# Altium PCB PCB2 - Copie.PcbDoc
Units mm, origin at the board's own origin, x right, y up, seen from the top; angles counter-clockwise.
Board outline 50 x 50 mm, 2 copper layers (Top Layer, Bottom Layer); 85 components, 71 nets, 280 pads, 0 vias.
Unrouted connection lines stored in the file: 176.
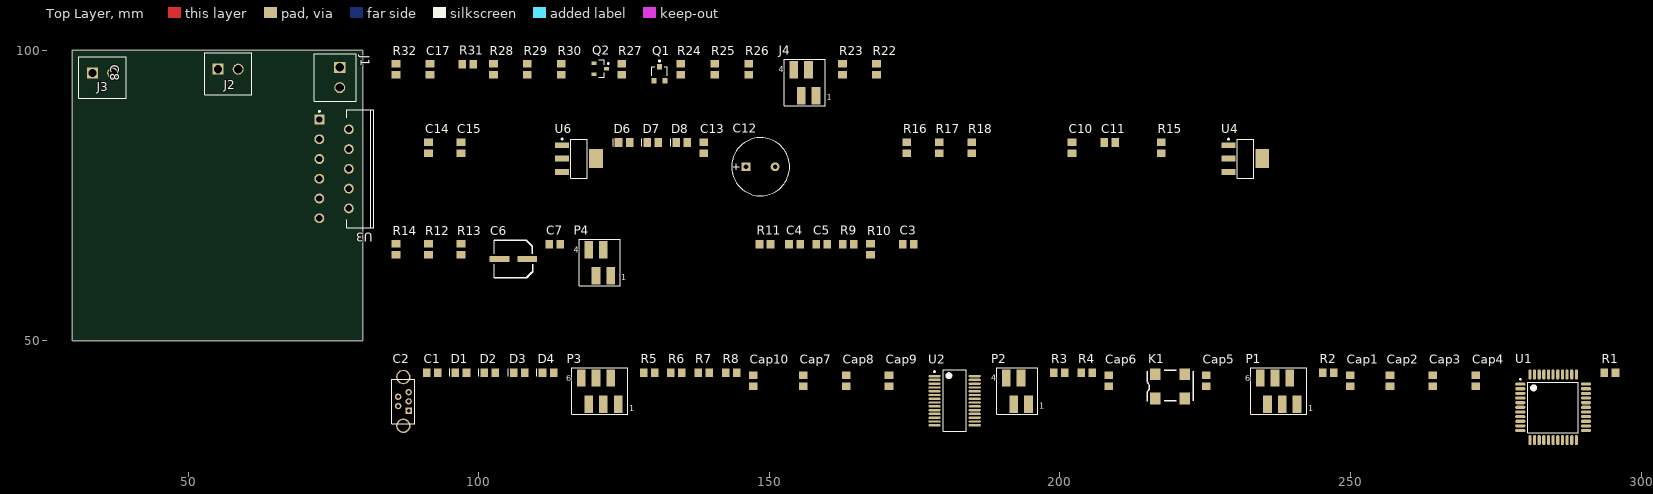
[diagram p0: Top Layer view]
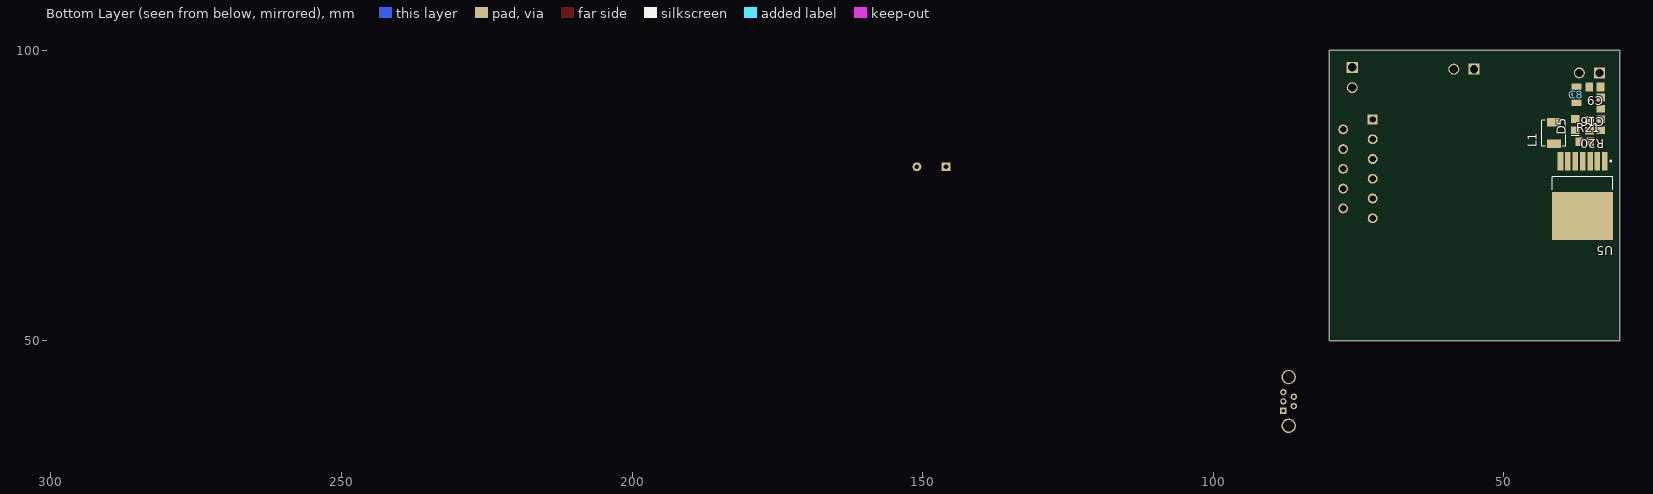
[diagram p1: Bottom Layer view, seen from below]

## Layer stack, top to bottom
Top Solder: solder mask 0.0102, Solder Resist, Dk 3.5
Top Layer: signal copper 0.0356
Dielectric 1: dielectric 0.32, FR-4, Dk 4.8
Bottom Layer: signal copper 0.0356
Bottom Solder: solder mask 0.0102, Solder Resist, Dk 3.5

## Board outline
30,100 80,100 80,50 30,50

## Design rules (kind name [scope] priority, off if disabled: settings)
Clearance [All] p1: gap=0.254
PolygonConnect [All] p1: connectstyle=Relief reliefconductorwidth=0.254 reliefentries=4 polygonreliefangle="90 Angle" airgapwidth=0.254
RoutingVias [All] p1: holewidth=0.711 width=1.27 viastyle="Through Hole" minholewidth=0.711 minwidth=1.27 maxholewidth=0.711 maxwidth=1.27
SolderMaskExpansion [All] p1: expansion=0.102
UnpouredPolygon [All] p1: allowunpoured=FALSE
Width [All] p1: maxlimit=0.254 minlimit=0.254 preferedwidth=0.254
29 further rules are at their usual default settings.

## Classes and differential pairs
component class "Sheet 1 - Micro": C1 C2 Cap1 Cap2 Cap3 Cap4 Cap5 Cap6 Cap7 Cap8 Cap9 Cap10 D1 D2 D3 D4 K1 P1 P2 P3 R1 R2 R3 R4 R5 R6 R7 R8 U1 U2
component class "Sheet 2 - Moteurs": C3 C4 C5 C6 C7 J1 P4 R9 R10 R11 R12 R13 R14 U3
component class "Sheet 3 - Alims": C8 C9 C10 C11 C12 C13 C14 C15 C16 D5 D6 D7 D8 J2 J3 L1 R15 R16 R17 R18 R20 R21 U4 U5 U6 ""
component class "Sheet 4 - Capteurs": C17 J4 Q1 Q2 R22 R23 R24 R25 R26 R27 R28 R29 R30 R31 R32

## Components (designator, comment, footprint, x,y, rotation, side; value= is the part's Value field where it differs from the comment)
C1 "100pF" C0805 91.957,44.503 r0 top
C2 "WE-Communication Connectors 651005136421" 651005136421 87.004,39.55 r90 top
C3 "0.1uF" C0805 173.872,66.601 r0 top
C4 "10nF" C0805 154.314,66.601 r0 top
C5 "10nF" C0805 159.013,66.601 r0 top
C6 "220uF" "Capa CMS D6.3_E1.8" 105.927,64.061 r0 top
C7 "1uF" C0805 113.039,66.601 r0 top
C8 "100uF" C1206 37.475,92.325 r270 bottom
C9 "0.1uF" C0805 34.275,93.675 r0 bottom
C10 "1uF" C0805 202.066,83.238 r90 top
C11 "10uF" C0805 208.543,84.127 r0 top
C12 "1200uF" CAPA_D10_E5 148.472,79.936 r0 top
C13 "0.1uF" C0805 138.693,83.238 r90 top
C14 "1UF" C0805 91.322,83.238 r90 top
C15 "10uF" C0805 96.91,83.238 r90 top
C16 "0.2uF" C0805 33.275,90.9 r270 bottom
C17 "100pF" C0805 91.576,96.7 r90 top
Cap1 "0.1uF" C0805 249.945,43.106 r90 top
Cap2 "0.1uF" C0805 256.803,43.106 r90 top
Cap3 "0.1uF" C0805 264.169,43.106 r90 top
Cap4 "0.1uF" C0805 271.535,43.106 r90 top
Cap5 "0.1uF" C0805 225.18,43.106 r90 top
Cap6 "0.1uF" C0805 208.416,43.106 r90 top
Cap7 "0.1uF" C0805 155.838,43.106 r90 top
Cap8 "0.1uF" C0805 163.204,43.106 r90 top
Cap9 "4.7uF" C0805 170.57,43.106 r90 top
Cap10 "0.1uF" C0805 147.202,43.106 r90 top
D1 "LED" "LED 0805" 96.91,44.503 r0 top
D2 "LED" "LED 0805" 101.863,44.503 r0 top
D3 "LED" "LED 0805" 106.943,44.503 r0 top
D4 "LED" "LED 0805" 111.896,44.503 r0 top
D5 "D Schottky" D0805 37.675,87.2 r90 bottom
D6 "LED" "LED 0805" 124.977,84.127 r0 top
D7 "LED" "LED 0805" 129.93,84.127 r0 top
D8 "LED" "LED 0805" 134.883,84.127 r0 top
J1 "WE Type 691321100002" 691321100002 76.05,95.3 r270 top
J2 "WE Type 691321100002" 691321100002 56.825,96.725 r0 top
J3 "WE Type 691321100002" 691321100002 35.225,96.1 r0 top
J4 "WE 4 pins" 690367280476 156.092,94.414 r0 top
K1 "Quartz 10Mhz" IQXO-70 216.417,44.249 r0 top
L1 "15uH" "Inductance 4.06 x 4.45" 41.35,85.725 r90 bottom
P1 "mini connect" 690367280676 237.626,41.328 r0 top
P2 "mini connect" 690367280476 192.668,41.328 r0 top
P3 "Mini connect" 690367280676 120.786,41.328 r0 top
P4 "WE 4 pins" 690367280476 120.786,63.426 r0 top
Q1 "MOSFET P" SOT-23 131.073,95.938 r0 top
Q2 "Transistor NPN" SOT23_L 120.913,96.827 r0 top
R1 "10K" 0805 294.649,44.503 r0 top
R2 "100R" 0805 246.135,44.503 r0 top
R3 "1K" 0805 199.907,44.503 r0 top
R4 "1K" 0805 204.606,44.503 r0 top
R5 "330R" 0805 129.295,44.503 r0 top
R6 "330R" 0805 133.994,44.503 r0 top
R7 "470R" 0805 138.693,44.503 r0 top
R8 "470R" 0805 143.392,44.503 r0 top
R9 "470R" 0805 163.585,66.601 r0 top
R10 "10K" 0805 167.395,65.712 r90 top
R11 "15K" 0805 149.234,66.601 r0 top
R12 "1K" 0805 91.322,65.712 r90 top
R13 "1K" 0805 96.91,65.712 r90 top
R14 "1K" 0805 85.734,65.712 r90 top
R15 "0R" 0805 217.433,83.238 r90 top
R16 "330R" 0805 173.618,83.238 r90 top
R17 "470R" 0805 179.206,83.238 r90 top
R18 "1K" 0805 184.794,83.238 r90 top
R19 "17K4" 0805 35.225,87.1 r90 bottom
R20 "1K" 0805 33.275,87.15 r270 bottom
R21 "2K" 0805 36.05,84.225 r180 bottom
R22 "215K" 0805 168.411,96.7 r90 top
R23 "10K" 0805 162.569,96.7 r90 top
R24 "0R" 0805 134.756,96.7 r90 top
R25 "1K" 0805 140.598,96.7 r90 top
R26 "0R" 0805 146.44,96.7 r90 top
R27 "1K" 0805 124.596,96.7 r90 top
R28 "0R" 0805 102.498,96.7 r90 top
R29 "10K" 0805 108.34,96.7 r90 top
R30 "0R" 0805 114.182,96.7 r90 top
R31 "10K" 0805 98.053,97.589 r0 top
R32 "3K4" 0805 85.734,96.7 r90 top
U1 "DSPIC33FJ128MC804T-I/PT" TQFP-PT44_N 284.87,38.534 r0 top
U2 "IC_FT232RL" SSOP-28 181.873,39.677 r0 top
U3 "LMD18200T" TA11B 75.075,79.575 r270 top
U4 "LM1117MP-3.3" MP04A_N 231.911,81.333 r0 top
U5 "LM2588S-ADJ" TS7B_N 36.4,74.9 r270 bottom
U6 "LM1117IMP-5.0" MP04A_N 117.23,81.333 r0 top

## Footprints (in the part's own frame and the unit in brackets; to place one, negate y for a bottom-side part, rotate by r counter-clockwise, add the part's x,y. Pads: shape width x height; smd on the part's side, far side on the other; paste and mask are expansions set on the pad)
0805 [mm] "Chip Resistor; Body 2.0 x 1.3 mm (LxW typ)"
  rect 1.3x1.5 smd: 1(-0.95,0) 2(0.95,0)
  body extent -1,-0.62 1,0.63, height 0.78
651005136421 [mm] "5 pins"
  rect 1.1x1.1 hole 0.6: 1(-1.6,-0.9)
  round 1.1 hole 0.6: 2(-0.8,0.9) 3(0,-0.9) 4(0.8,0.9) 5(1.6,-0.9)
  round 2.5 hole 2: Z1(4.2,0) Z2(-4.2,0)
  silkscreen extent -3.85,-1.98 3.85,1.98, body extent -5.1,-1.95 5.1,1.95, height 9.21
690367280476 [mm] "without Latch, 4 pins, SMT, straight"
  rect 1.5x3 smd: 1(1.905,-2.25) 2(0.635,2.25) 3(-0.635,-2.25) 4(-1.905,2.25)
  silkscreen extent -3.54,-4 3.54,4, body extent -3.54,-5 3.54,3.5, height 5.7
690367280676 [mm] "without Latch, 6 pins, SMT, straight"
  rect 1.5x3 smd: 1(3.175,-2.25) 2(1.905,2.25) 3(0.635,-2.25) 4(-0.635,2.25) 5(-1.905,-2.25) 6(-3.175,2.25)
  silkscreen extent -4.81,-4 4.81,4, body extent -4.81,-5 4.81,3.5, height 5.75
691321100002 [mm] "3,50mm - PCB Vertical - 02p"
  rect 1.9x1.9 hole 1.4: 1(-1.75,0)
  round 1.9 hole 1.4: 2(1.75,0)
  silkscreen extent -4.05,-4.4 4.05,2.8, body extent -4.05,-4.4 4.05,2.8, height 9.21
C0805 [mm] "Chip Resistor; Body 2.0 x 1.3 mm (LxW typ)"
  rect 1.3x1.5 smd: 1(-0.95,0) 2(0.95,0)
  body extent -0.97,-0.62 1.03,0.63, height 0.78
C1206 [mm] "Chip Capacitor, Body 3.2x1.6mm, IPC High Density"
  rect 1.1x1.7 smd: 1(-1.35,0) 2(1.35,0)
  silkscreen extent -0.4,-0.75 0.4,0.75, body extent -1.7,-0.9 1.7,0.9, height 1.3
"Capa CMS D6.3_E1.8" [mm]
  rect 3.4x1 smd: 1(2.4,0) 2(-2.4,0)
  silkscreen extent -3.33,-3.2 3.3,3.2, body extent -3.77,-3.3 3.83,3.3, height 8
CAPA_D10_E5 [mm]
  rect 1.524x1.524 hole 0.8: 1(-2.5,0)
  round 1.524 hole 0.8: 2(2.5,0)
  silkscreen extent -5,-5 5,5, body extent -5,-5 5,5, height 12
D0805 [mm] "Chip Capacitor; Body 2.0 x 1.2 mm (LxW typ)"
  rect 1.3x1.5 smd: 1(-0.95,0) 2(0.95,0)
  silkscreen extent -1.9,-0.65 -1.9,0.65, body extent -1.17,-0.67 1.13,0.68, height 0.76
"Inductance 4.06 x 4.45" [mm]
  rect 1.5x2.4 smd: 1(-1.85,0) 2(1.85,0)
  silkscreen extent -2.25,-2.05 2.25,2.05
IQXO-70 [mil]
  rect 70x79 smd: 1(0,-165) 2(200,-165) 3(200,0) 4(0,0)
  silkscreen extent -55,-182 255,25, body extent -18,-154 226,-8, height 48
"LED 0805" [mm] "Chip Capacitor; Body 2.0 x 1.2 mm (LxW typ)"
  rect 1.3x1.5 smd: 1(-0.95,0) 2(0.95,0)
  silkscreen extent -1.9,-0.65 -1.9,0.65, body extent -1.01,-0.62 1.01,0.63, height 1.1
MP04A_N [mm] "SOT223, 4-Leads, Body 6.5x3.5mm, Pitch 2.3mm, Lead Span 7mm, IPC Medium Density"
  rect 2.4x1 smd: 1(-2.9,2.3) 2(-2.9,0) 3(-2.9,-2.3)
  rect 2.4x3.3 smd: 4(2.9,0)
  silkscreen extent -3.02,-3.35 1.4,3.47, body extent -1.85,-3.35 1.85,3.35, height 1.8
SOT23_L [mm] "SOT23, 3-Leads, Body 2.9x1.3mm, Pitch 0.95mm, Lead Span 2.3mm - Reverse Pinning, IPC High Density"
  rect 0.85x0.6 smd: 1(1.075,0) 2(-1.075,-0.95) 3(-1.075,0.95)
  silkscreen extent -0.3,-1.5 1.48,1.5, body extent -0.7,-1.5 0.7,1.5, height 1.1
SOT-23 [mm] "SOT-23; 3 Leads; Body 3.0 x 2.5 mm, inc. leads (LxW max), Alternate Lead Configuration"
  rect 0.9x0.95 smd: 1(0,1.175) 2(-0.95,-1.175) 3(0.95,-1.175)
  silkscreen extent -1.3,-0.3 1.3,2.32
SSOP-28 [mm] "28-Pin SSOP 0.65 mm Pitch"
  oval 2.1x0.4 smd: 1(-3.45,4.225) 2(-3.45,3.575) 3(-3.45,2.925) 4(-3.45,2.275) 5(-3.45,1.625) 6(-3.45,0.975) 7(-3.45,0.325) 8(-3.45,-0.325) 9(-3.45,-0.975) 10(-3.45,-1.625) 11(-3.45,-2.275) 12(-3.45,-2.925) 13(-3.45,-3.575) 14(-3.45,-4.225) 15(3.45,-4.225) 16(3.45,-3.575) 17(3.45,-2.925) 18(3.45,-2.275) 19(3.45,-1.625) 20(3.45,-0.975) 21(3.45,-0.325) 22(3.45,0.325) 23(3.45,0.975) 24(3.45,1.625) 25(3.45,2.275) 26(3.45,2.925) 27(3.45,3.575) 28(3.45,4.225)
  silkscreen extent -3.57,-5.3 2,5.3, body extent -2.7,-5.3 2.7,5.3, height 2
TA11B [mm] "TO, Thru-Hole, Vertical, Heatsink Mounted; 11 Bent Staggered Leads; Pitch 1.7 mm"
  rect 1.7x1.7 hole 1.1: 1(-8.5,-2.54)
  round 1.7 hole 1.1: 2(-6.8,2.54) 3(-5.1,-2.54) 4(-3.4,2.54) 5(-1.7,-2.54) 6(0,2.54) 7(1.7,-2.54) 8(3.4,2.54) 9(5.1,-2.54) 10(6.8,2.54) 11(8.5,-2.54)
  silkscreen extent -10.15,-2.66 10.15,6.84, body extent -10.15,2.14 10.15,6.84, height 21
TQFP-PT44_N [mm] "Thin QFP, 44-Leads, Body 10x10mm, Pitch 0.8mm, IPC Medium Density"
  oval 1.75x0.55 smd: 1(-5.65,4) 2(-5.65,3.2) 3(-5.65,2.4) 4(-5.65,1.6) 5(-5.65,0.8) 6(-5.65,0) 7(-5.65,-0.8) 8(-5.65,-1.6) 9(-5.65,-2.4) 10(-5.65,-3.2) 11(-5.65,-4) 23(5.65,-4) 24(5.65,-3.2) 25(5.65,-2.4) 26(5.65,-1.6) 27(5.65,-0.8) 28(5.65,0) 29(5.65,0.8) 30(5.65,1.6) 31(5.65,2.4) 32(5.65,3.2) 33(5.65,4)
  oval 0.55x1.75 smd: 12(-4,-5.65) 13(-3.2,-5.65) 14(-2.4,-5.65) 15(-1.6,-5.65) 16(-0.8,-5.65) 17(0,-5.65) 18(0.8,-5.65) 19(1.6,-5.65) 20(2.4,-5.65) 21(3.2,-5.65) 22(4,-5.65) 34(4,5.65) 35(3.2,5.65) 36(2.4,5.65) 37(1.6,5.65) 38(0.8,5.65) 39(0,5.65) 40(-0.8,5.65) 41(-1.6,5.65) 42(-2.4,5.65) 43(-3.2,5.65) 44(-4,5.65)
  silkscreen extent -5.77,-4.35 4.35,4.95, body extent -5,-5 5,5, height 1.2
TS7B_N [mm] "D2-PAK, 8-Leads, Body 8.6x10.2mm, Pitch 1.27mm, Lead Span 14.1mm, IPC Medium Density"
  rect 3.2x0.95 smd: 1(-6,3.81) 2(-6,2.54) 3(-6,1.27) 4(-6,0) 5(-6,-1.27) 6(-6,-2.54) 7(-6,-3.81)
  rect 8.3x10.5 smd: 8(3.45,0)
  silkscreen extent -6.12,-5.2 -1.1,5.2, body extent -3.35,-5.2 6.05,5.2, height 4.64

## Part data
C1 C3 C4 C5 C7 C9 C10 C11 C13 C14 C15 C16 C17 Cap1 Cap2 Cap3 Cap4 Cap5 Cap6 Cap7 Cap8 Cap9: library part Cap, "Capacitor 0805"
C2: "WR-COM Mini USB Vertical TH Type B 5 Contacts"
C6: library part Cap2, "EEEFK1C221XP"
C8: library part Cap2, "Capacitor 1206"
C12: library part Cap2, "EEUFM1C122L"
Cap10: library part Cap, "Capacitor"
D1 D2 D3 D4 D6 D7 D8: library part LED2, "Typical RED, GREEN, YELLOW, AMBER GaAs LED 0805"
D5: "Schottky Diode 0805"
J1 J2 J3: library part "WE-Terminal Blocks Plugable Type 691321100002", "WR-TBL Terminal block - serie 3211 - 3.50 mm"
J4: library part "MICRO-MATCH FOB.04P", "connecteur WE"
K1: library part OSCILLATEUR, "Oscillateur quartz"
L1: library part Inductor, "SRP4020TA-150M"
P1 P3: library part MHDR1X6, "Header, 6-Pin"
P2 P4: library part MHDR1X4, "Header, 4-Pin"
Q1: library part PMOS-2, "P-Channel Power MOSFET"
Q2: library part QNPN, "NPN Bipolar Transistor"
R1 R2 R3 R4 R5 R6 R7 R8 R9 R10 R11 R12 R13 R14 R15 R16 R17 R18 R19 R20 R21 R22 R23 R24 R25 R26 R27 R28 R29 R30 R31 R32: library part Res3, "Resistor 0805"
U1: "High-Performance 16-bit Digital Signal Controller, 128 KB Flash, 16 KB RAM, 44-Pin TQFP, Industrial Temperature, Tape and Reel"
U2: "FT232R USB UART"
U3: "3A, 55V H-Bridge"
U4 U6: "800mA Low-Dropout Linear Regulator"
U5: "SIMPLE SWITCHER 5A Flyback Regulator with Shutdown"

## Nets (pads, with @x,y where several pads share a name; then routed paths per layer and width w, separated by ;. In a path a pad name is that pad's centre, name@x,y a point inside that pad or via, vN(x,y) a via of type N, cw(c..) or ccw(c..) an arc to the next point about the centre after c; other vN are vias at no path point)
"3.3 V": R1.2
3.3V: C1.2 C11.2 Cap1.2 Cap2.2 Cap3.2 P1.2 P2.3 P3.4 R3.2 R4.2 R16.2 R22.1 U1.17 U1.28 U1.40 U4.2 U4.4
5V: C2.1 C3.2 C15.2 Cap6.2 Cap7.1 Cap8.1 Cap9.1 K1.1 K1.4 P4.3 R17.2 U2.4 U2.20 U6.2 U6.4
12V: C6.1 C7.2 C10.2 C12.1 C13.2 C14.2 J2.2 Q1.3 R15.2 R18.2 R23.2 U3.6 U4.3 U6.3
"EN CAPTEUR": J4.4 Q1.1
GND: C1.1 C2.5 C3.1 C6.2 C7.1 C8.2 C9.1 C10.1 C11.1 C12.2 C13.1 C14.1 C15.1 C16.1 C17.2 Cap1.1 Cap2.1 Cap3.1 Cap4.1 Cap5.1 Cap6.1 Cap7.2 Cap8.2 Cap9.2 Cap10.2 D1.2 D2.2 D3.2 D4.2 D6.2 D7.2 D8.2 J2.1 J3.1 J4.1 J4.3 K1.2 P1.3 P2.1 P3.6 P4.2 Q2.2 R11.2 R14.2 R21.1 R31.1 R32.1 U1.6 U1.16 U1.29 U1.39 U2.7 U2.18 U2.21 U2.25 U2.26 U3.7 U4.1 U5.4 U5.8 U6.1
NC: U2.8 U2.24
NetC2_2: C2.2 U2.16
NetC2_3: C2.3 U2.15
NetC4_1: C4.1 U3.1
NetC4_2: C4.2 J1.1 U3.2
NetC5_1: C5.1 U3.11
NetC5_2: C5.2 J1.2 U3.10
NetC8_1: C8.1 C9.2 J3.2 L1.1 U5.7
NetC16_2: C16.2 R20.1
NetC17_1: C17.1 R24.2 R28.2
NetCap5_2: Cap5.2 R1.1 R2.1
NetCap10_1: Cap10.1 U2.17
NetD1_1: D1.1 R5.2
NetD2_1: D2.1 R6.2
NetD3_1: D3.1 R7.2
NetD4_1: D4.1 R8.2
NetD5_1: D5.1 L1.2 U5.5
NetD5_2: D5.2 R15.1 R19.2
NetD6_1: D6.1 R16.1
NetD7_1: D7.1 R17.1
NetD8_1: D8.1 R18.1
NetJ4_2: J4.2 R26.2 R30.1
NetK1_3: K1.3 U1.30
NetP1_1: P1.1 R2.2 U1.18
NetP1_4: P1.4
NetP1_5: P1.5 U1.22
NetP2_2: P2.2 R3.1 U1.1
NetP2_4: P2.4 R4.1 U1.44
NetP3_1: P3.1 U1.32
NetP3_2: P3.2 U1.15
NetP3_3: P3.3 U1.14
NetP3_5: P3.5 U1.13
NetP4_1: P4.1 R13.2
NetP4_4: P4.4 R10.2
NetQ1_1: Q1.2 Q2.3 R23.1
NetQ2_1: Q2.1 R27.1 R31.2
NetR5_1: R5.1
NetR6_1: R6.1
NetR7_1: R7.1 U2.23
NetR8_1: R8.1 U2.22
NetR9_1: R9.1 U1.4
NetR9_2: R9.2 R10.1 R11.1
NetR12_1: R12.1 U1.5
NetR12_2: R12.2 R13.1 R14.1
NetR19_1: R19.1 R21.2 U5.3
NetR20_2: R20.2 U5.2
NetR22_2: R22.2 R24.1 R25.1
NetR25_2: R25.2 R26.1
NetR27_2: R27.2
NetR28_1: R28.1 R29.2 R32.2
NetR29_1: R29.1 R30.2
NetU1_2: U1.2 U3.5
NetU1_3: U1.3 U3.3
NetU1_8: U1.8
NetU1_9: U1.9
NetU1_10: U1.10 U2.1
NetU1_11: U1.11 U2.5
NetU1_23: U1.23
NetU1_24: U1.24
NetU1_25: U1.25
NetU1_26: U1.26
NetU1_34: U1.34
NetU1_35: U1.35
NetU1_43: U1.43
VCAP: Cap4.2 U1.7
pads on no net: C2.4 C2.Z1 C2.Z2 P1.6 U1.12 U1.19 U1.20 U1.21 U1.27 U1.31 U1.33 U1.36 U1.37 U1.38 U1.41 U1.42 U2.2 U2.3 U2.6 U2.9 U2.10 U2.11 U2.12 U2.13 U2.14 U2.19 U2.27 U2.28 U3.4 U3.8 U3.9 U5.1 U5.6

## Silkscreen, mask and mechanical layers (free items; w line width, h text height)
Mechanical 1:
  the board outline again, w1.2

## Text inside footprints (layer, text, board x,y; h text height)
J4: Top Overlay "4" at 151.592,96.164 h1; Top Overlay "1" at 159.842,91.414 h1
P1: Top Overlay "6" at 231.911,42.979 h1; Top Overlay "1" at 242.706,37.899 h1
P2: Top Overlay "4" at 188.168,43.078 h1; Top Overlay "1" at 196.418,38.328 h1
P3: Top Overlay "6" at 115.071,42.979 h1; Top Overlay "1" at 125.866,37.899 h1
P4: Top Overlay "4" at 116.286,65.176 h1; Top Overlay "1" at 124.536,60.426 h1